# Altium PCB Canboardwteensy3.2.PcbDoc
Units mil, origin at the board's own origin, x right, y up, seen from the top; angles counter-clockwise.
Board outline 1850 x 2680 mil, 2 copper layers (Top Layer, Bottom Layer); 27 components, 27 nets, 204 pads, 21 vias.
Unrouted connection lines stored in the file: 1.
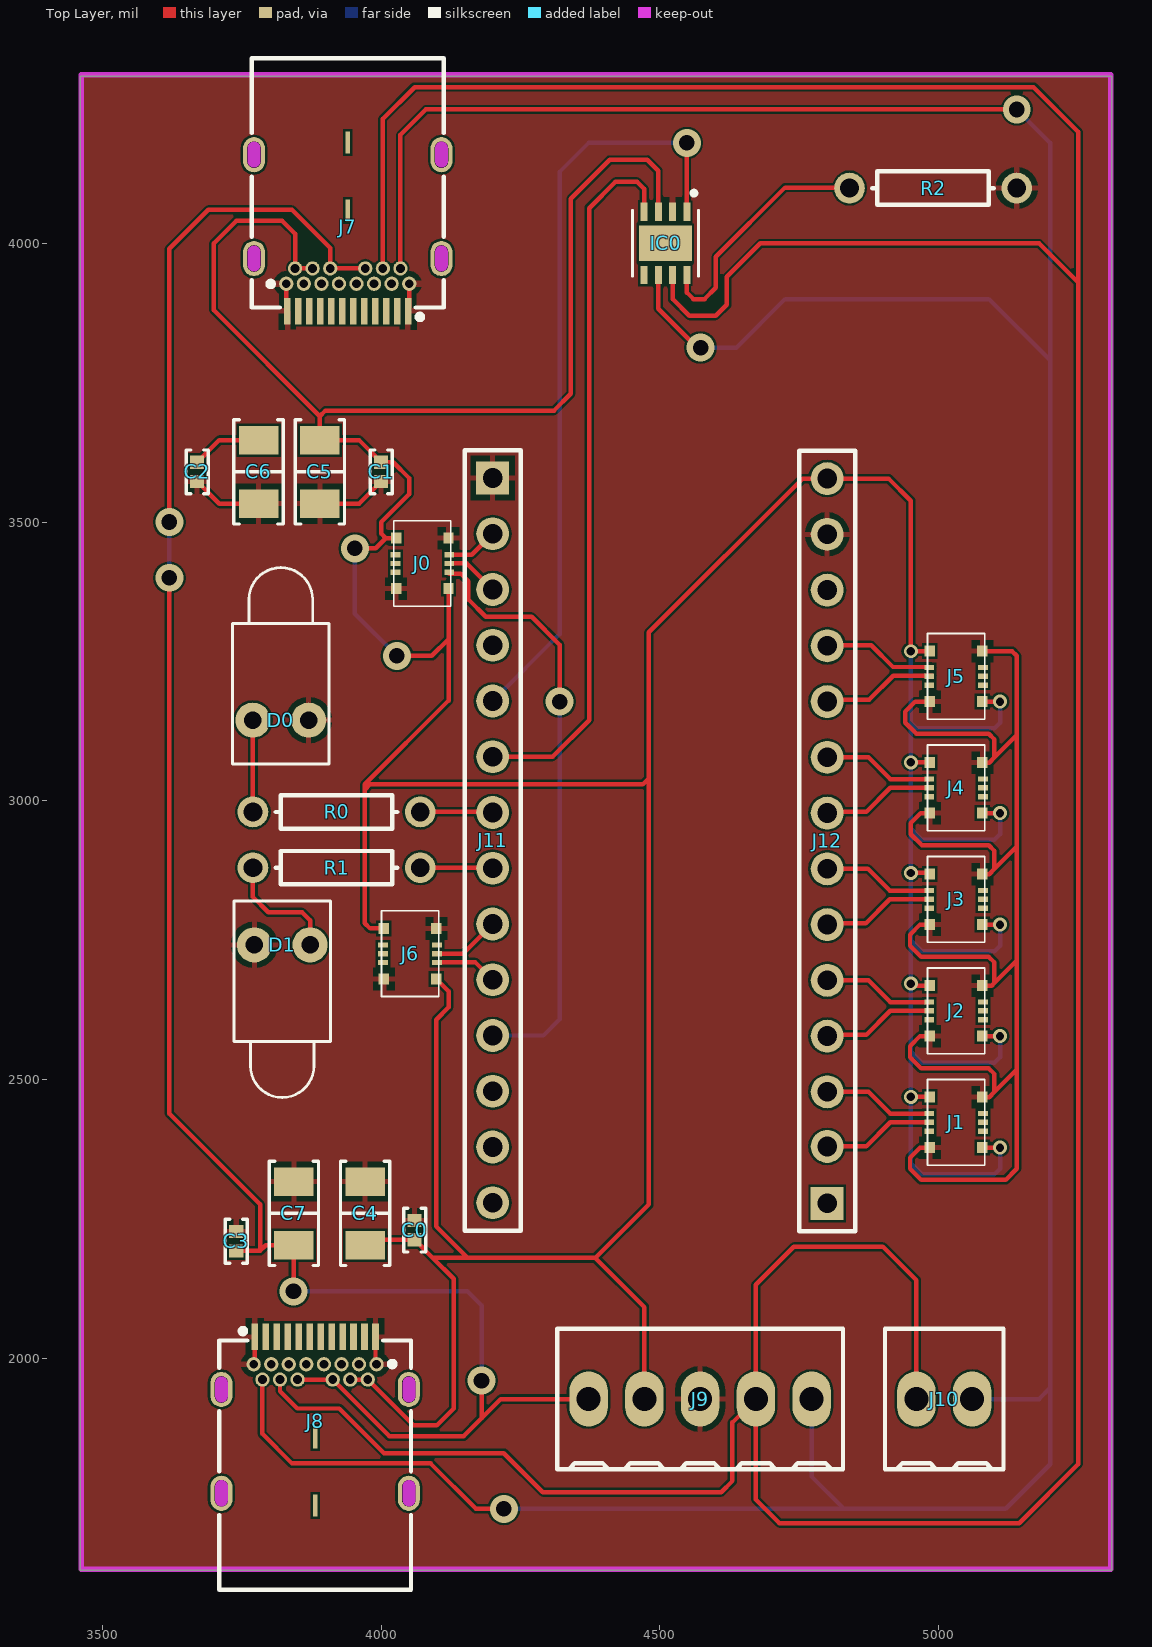
[diagram p0: Top Layer view]
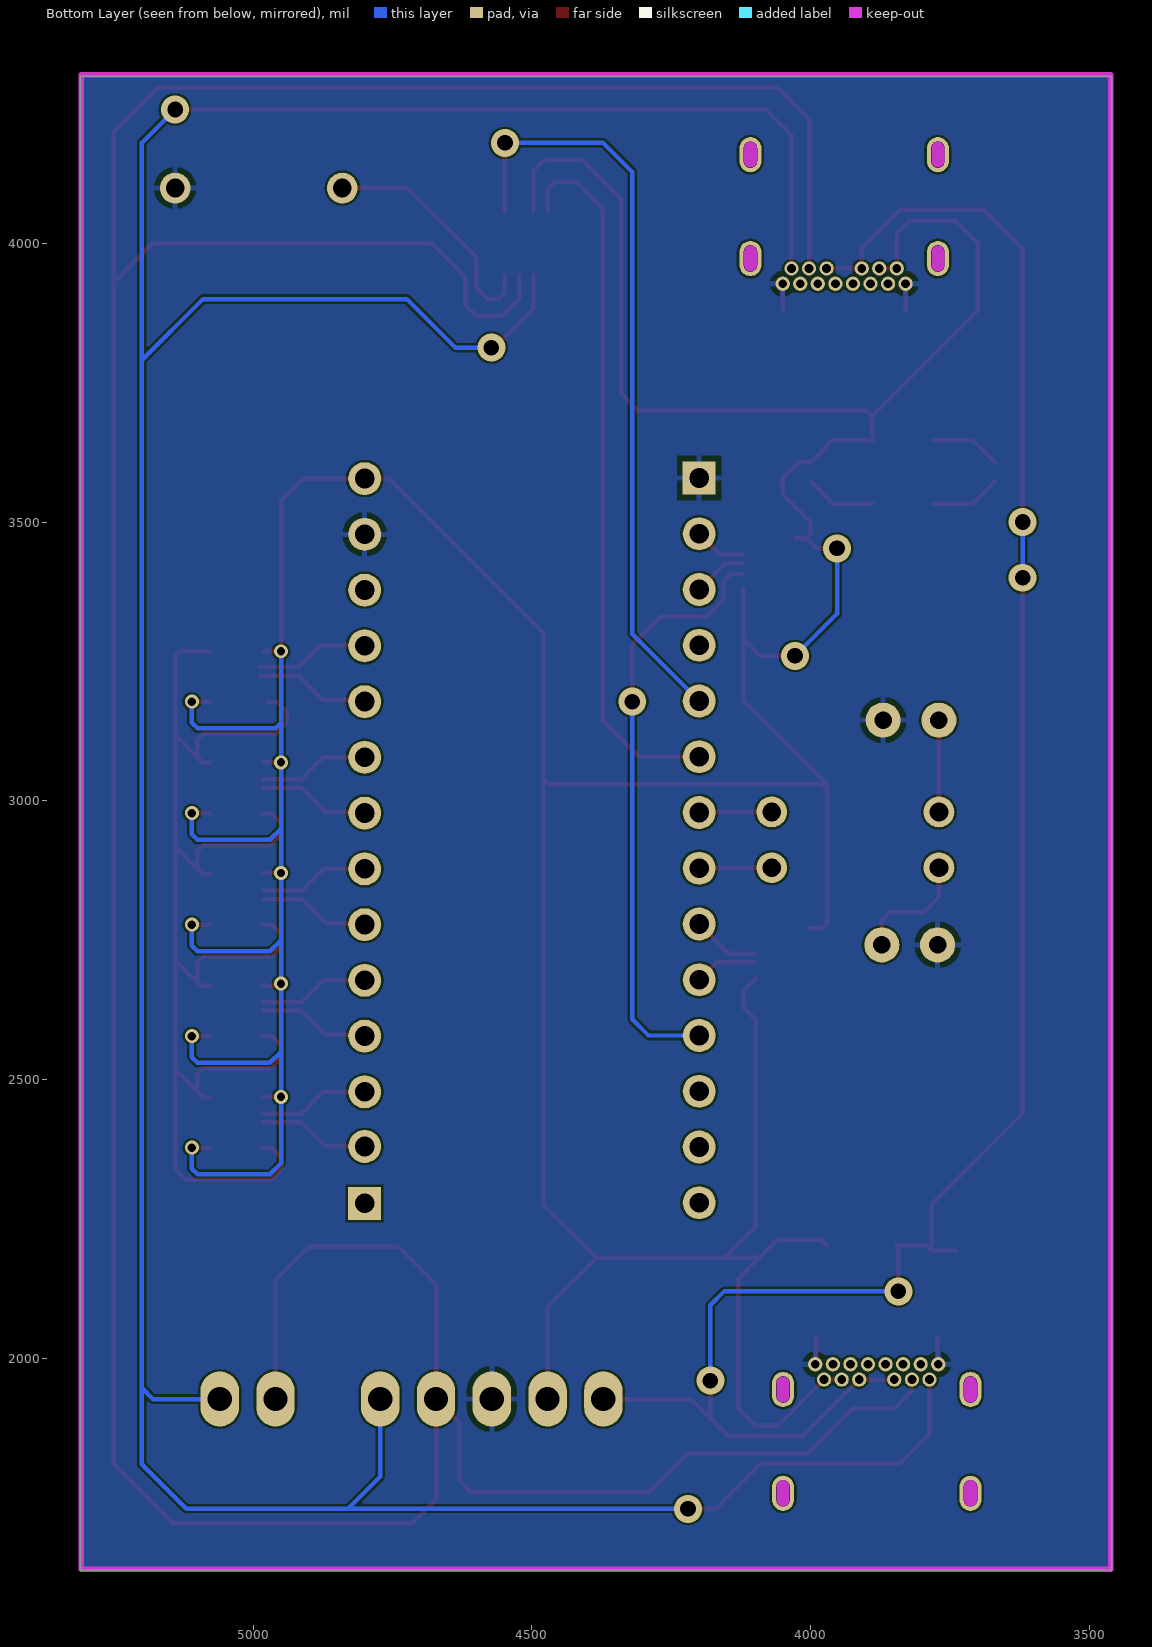
[diagram p1: Bottom Layer view, seen from below]
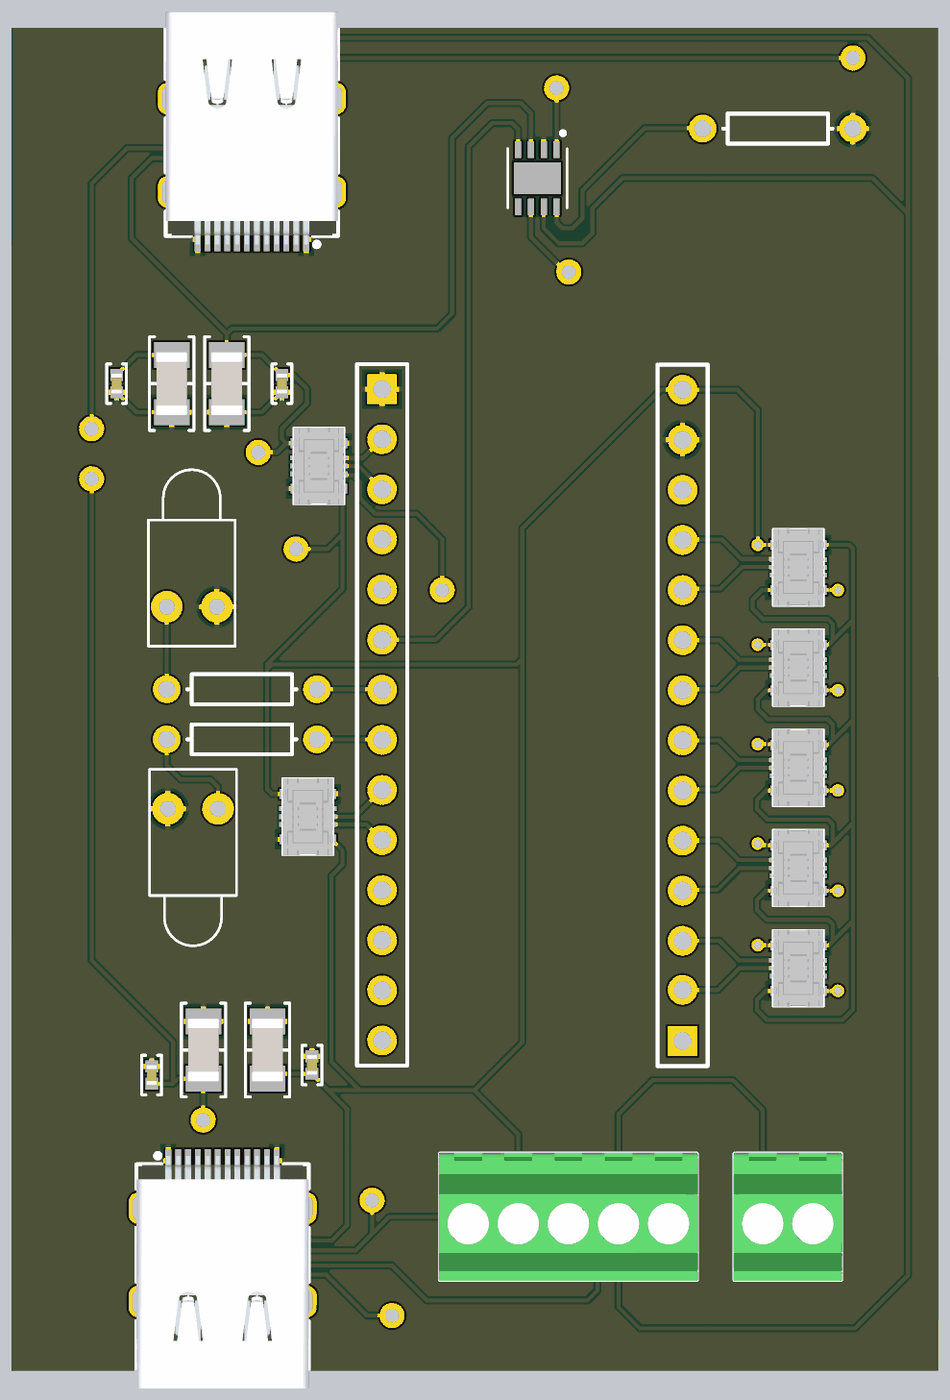
[diagram p2: 3D render of the assembled board from above, using the file's embedded part models]

## Layer stack, top to bottom
Top Solder: solder mask 0.4, Solder Resist, Dk 3.5
Top Layer: signal copper 1.4
Dielectric 1: dielectric 12.6, FR-4, Dk 4.8
Bottom Layer: signal copper 1.4
Bottom Solder: solder mask 0.4, Solder Resist, Dk 3.5

## Board outline
3460,4300 3460,1620 5310,1620 5310,4300
cut-out: 3771.89,4180.51

## Design rules (kind name [scope] priority, off if disabled: settings)
Clearance Clearance_6 [All] p1: gap=4 ignorepadtopadclearanceinfootprint=TRUE except(0: Poly-Poly)
MinimumSolderMaskSliver [All] p1: minsoldermaskwidth=4
PolygonConnect [All] p1: connectstyle=Relief reliefconductorwidth=10 reliefentries=4 polygonreliefangle="90 Angle" airgapwidth=10
RoomDefinition SensorBoardSchematic [InComponentClass('SensorBoardSchematic')] p1: confinementstyle=ConfineIn formatcopy=TRUE lockcomponents=FALSE outline 5306.85,1620 3460,1620 3460,4300 5306.85,4300
RoomDefinition "Sensor Input" [InComponentClass('Sensor Input')] p2: confinementstyle=ConfineIn formatcopy=TRUE lockcomponents=FALSE outline 5310.15,1620 3460,1620 3460,4300 5310.15,4300
RoutingVias [All] p1: holewidth=28 width=50 viastyle="Through Hole" minholewidth=28 minwidth=50 maxholewidth=28 maxwidth=50
SilkToSilkClearance [All] p1: silktosilkclearance=0
SilkToSolderMaskClearance [IsPad] p1: minsilkscreentomaskgap=4 clearancetoexposedcopper=TRUE
SolderMaskExpansion [All] p1: expansion=4
UnRoutedNet [All] p1: checkbadconnections=TRUE
Width [All] p1: maxlimit=8 minlimit=8 preferedwidth=8 minimp=50.000000 maximp=50.000000 favimp=50.000000
26 further rules are at their usual default settings.

## Classes and differential pairs
component class "Sensor Input": J0 J1 J2 J3 J4 J5 J6
component class SensorBoardSchematic: C0 C1 C2 C3 C4 C5 C6 C7 D0 D1 IC0 J7 J8 J9 J10 J11 J12 R0 R1 R2

## Components (designator, comment, footprint, x,y, rotation, side; value= is the part's Value field where it differs from the comment)
C0 "0.1uF" "CAP 0402/1005" 4060,2230 r270 top
C1 "0.1uF" "CAP 0402/1005" 4000,3590 r90 top
C2 "0.1uF" "CAP 0402/1005" 3670,3590 r90 top
C3 "0.1uF" "CAP 0402/1005" 3740,2210 r270 top
C4 "4.7uF" "CAP 1206/3216 - 1.8MM" 3971.3,2260 r270 top
C5 "4.7uF" "CAP 1206/3216 - 1.8MM" 3890,3590 r90 top
C6 "4.7uF" "CAP 1206/3216 - 1.8MM" 3780,3590 r90 top
C7 "4.7uF" "CAP 1206/3216 - 1.8MM" 3843.35,2260 r270 top
D0 "LED1" LED-1 3820,3144.61 r90 top
D1 "LED1" LED-1 3822.44,2741.5 r270 top
IC0 "TJA1051TK/3/1J" SON65P300X300X95-8N 4510,4000 r270 top
J0 "SlimStack 503548-0622" SlimStack_503548-0622 4125,3348.98 r90 top
J1 "SlimStack 503548-0622" SlimStack_503548-0622 4980,2500 r270 top
J2 "SlimStack 503548-0622" SlimStack_503548-0622 4980,2700 r270 top
J3 "SlimStack 503548-0622" SlimStack_503548-0622 4980,2900 r270 top
J4 "SlimStack 503548-0622" SlimStack_503548-0622 4980,3100 r270 top
J5 "SlimStack 503548-0622" SlimStack_503548-0622 4980,3300 r270 top
J6 "SlimStack 503548-0622" SlimStack_503548-0622 4102.95,2648.98 r90 top
J7 "632723300011" 632723300011 3940,4100 r180 top
J8 "632723300011" 632723300011 3881.5,1816.77 r0 top
J9 "282834-5" "TE 282834-5" 4572,1927 r180 top
J10 "282834-2" "TE 282834-2" 5010,1927 r180 top
J11 "Header 14" HDR1X14#1 4200,3579 r270 top
J12 "Header 14" HDR1X14#2 4800,2277.95 r90 top
R0 "Res1" AXIAL-0.3 3920,2980 r180 top value=1K
R1 "Res1" AXIAL-0.3 3920,2880 r180 top value=1K
R2 "Res1" AXIAL-0.3 4990,4099.03 r0 top value=1K

## Footprints (in the part's own frame and the unit in brackets; to place one, negate y for a bottom-side part, rotate by r counter-clockwise, add the part's x,y. Pads: shape width x height; smd on the part's side, far side on the other; paste and mask are expansions set on the pad)
632723300011 [mm] "USB 3.1 Type C Receptacle Horizontal THR"
  rect 0.3x1.2 smd: A1(-2.75,5.635) A2(-2.25,5.635) A3(-1.75,5.635) A4(-1.25,5.635) A5(-0.75,5.635) A6(-0.25,5.635) A7(0.25,5.635) A8(0.75,5.635) A9(1.25,5.635) A10(1.75,5.635) A11(2.25,5.635) A12(2.75,5.635)
  round 0.65 hole 0.4: B1(2.8,4.385) B2(2.4,3.685) B3(1.6,3.685) B4(1.2,4.385) B5(0.8,3.685) B6(0.4,4.385) B7(-0.4,4.385) B8(-0.8,3.685) B9(-1.2,4.385) B10(-1.6,3.685) B11(-2.4,3.685) B12(-2.8,4.385) Shell(-2,4.385) Shell(2,4.385)
  oval 1x1.6 hole 0.6 slot 1.2 at 90 deg: Shell(-4.27,3.235) Shell(-4.27,-1.495) Shell(4.27,3.235) Shell(4.27,-1.495)
  rect 0.2x1 smd: ""(0,1.055) ""(0,-2.045)
  silkscreen extent -4.37,-5.89 4.37,6.01, body extent -4.37,-5.9 4.37,5.9, height 3.05
AXIAL-0.3 [mm] "Axial Device, Thru-Hole; 2 Leads; 0.3 in Pin Spacing"
  round 1.4 hole 0.85: 1(-3.81,0) 2(3.81,0)
  silkscreen extent -2.77,-0.76 2.77,0.76
"CAP 0402/1005" [mm] "Chip Capacitor, 2-Leads, Body 1.02x0.51mm, IPC Medium Density"
  rect 0.6x0.64 smd: 1(-0.44,0) 2(0.44,0)
  silkscreen extent -1,-0.5 1,0.5, body extent -0.5,-0.26 0.5,0.26, height 0.52
"CAP 1206/3216 - 1.8MM" [mm] "Chip Capacitor, 2-Leads, Body 3.25x1.60mm, IPC Medium Density"
  rect 1.3x1.8 smd: 1(-1.45,0) 2(1.45,0)
  silkscreen extent -2.37,-1.12 2.37,1.12, body extent -1.6,-0.8 1.6,0.8, height 1.8
HDR1X14#1 [mm] "Connector; Header; 14 Position"
  rect 1.5x1.5 hole 0.9: 1(0,0)
  round 1.5 hole 0.9: 2(2.54,0) 3(5.08,0) 4(7.62,0) 5(10.16,0) 6(12.7,0) 7(15.24,0) 8(17.78,0) 9(20.32,0) 10(22.86,0) 11(25.4,0) 12(27.94,0) 13(30.48,0) 14(33.02,0)
  silkscreen extent -1.27,-1.27 34.29,1.27
HDR1X14#2 [mm] "Connector; Header; 14 Position"
  rect 1.5x1.5 hole 0.9: 1(0,0)
  round 1.5 hole 0.9: 2(2.592,0) 3(5.08,0) 4(7.62,0) 5(10.16,0) 6(12.7,0) 7(15.24,0) 8(17.78,0) 9(20.32,0) 10(22.86,0) 11(25.4,0) 12(27.94,0) 13(30.48,0) 14(33.02,0)
  silkscreen extent -1.27,-1.27 34.29,1.27
LED-1 [mm] "LED; 2 Leads"
  round 1.6 hole 0.8: 1(0,1.27) 2(0,-1.27)
  silkscreen extent -2,-2.2 6.95,2.2
SlimStack_503548-0622 [mm]
  rect 0.5x0.47 smd paste+0: 1(0.8,0.105) 2(3.1,0.105) 3(3.1,2.495) 4(0.8,2.495)
  rect 0.24x0.45 smd paste+0 mask+0.05: 5(1.55,0.075) 6(1.95,0.075) 7(2.35,0.075) 8(1.55,2.525) 9(1.95,2.525) 10(2.35,2.525)
  silkscreen extent 0,0 3.9,2.6, body extent 0,0 3.9,2.6, height 1
SON65P300X300X95-8N [mm]
  rect 0.84x0.32 smd: 1(-1.445,0.975) 2(-1.445,0.325) 3(-1.445,-0.325) 4(-1.445,-0.975) 5(1.445,-0.975) 6(1.445,-0.325) 7(1.445,0.325) 8(1.445,0.975)
  rect 1.6x2.4 smd: 9(0,0)
  silkscreen extent -2.38,-1.5 1.5,1.5
"TE 282834-2" [mm]
  oval 1.75x2.5 hole 1.1: 1(-1.27,0) 2(1.27,0)
  silkscreen extent -2.7,-3.2 2.7,3.2, body extent -2.77,-3.25 2.77,3.25, height 10
"TE 282834-5" [mm]
  oval 1.75x2.5 hole 1.1: 1(-5.08,0) 2(-2.54,0) 3(0,0) 4(2.54,0) 5(5.08,0)
  silkscreen extent -6.51,-3.2 6.51,3.2, body extent -6.58,-3.25 6.58,3.25, height 10

## Part data
C0 C1 C2 C3: library part C1005X7R1V104K050BB, "CAP CER 0.1UF 35V X7R 0402", Device Package="0402 (1005 Metric)", Manufacturer="TDK Corporation", Supplier Part Number 1=445-7344-2-ND, TemperatureCoefficient=X7R, TemperatureRange="-55C ~ 125C", Tolerance=10%, Voltage=35V, ComponentLink1Description=Datasheet, ComponentLink1URL=https://product.tdk.com/info/en/catalog/datasheets/mlcc_commercial_general_en.pdf, ComponentLink2Description="Digi-Key listing", ComponentLink2URL=http://digikey.com/product-detail/en/C1005X7R1V104K050BB/445-7344-2-ND/2732779, PartId=3862, Part Number=C1005X7R1V104K050BB, Price=0.0287, Supplier 1=Digi-Key, Type=-
C4 C5 C6 C7: library part 160R18X475KV4E, "CAP CER 4.7UF 16V X5R 1206", Device Package="1206 (3216 Metric)", Manufacturer="Johanson Dielectrics Inc.", Supplier Part Number 1=709-1234-2-ND, TemperatureCoefficient=X5R, TemperatureRange="-55C ~ 85C", Tolerance=10%, Voltage=16V, ComponentLink1Description=Datasheet, ComponentLink1URL=http://www.johansondielectrics.com/downloads/JDI-Tanceram.pdf, ComponentLink2Description="Digi-Key Listing", ComponentLink2URL=https://www.digikey.com/product-detail/en/johanson-dielectrics-inc/160R18X475KV4E/709-1234-2-ND/2074906, PartId=17939, Part Number=160R18X475KV4E, Price=0.1462, Supplier 1=Digi-Key
D0 D1: "Typical RED GaAs LED", LatestRevisionDate=08-Jul-2005, LatestRevisionNote="Mech Layer 1 removed.", PackageDescription="LED; 2 Leads", PackageReference=LED-1, Published=8-Jun-2000, Publisher="Altium Limited"
IC0: "TJA1051 Single 5 V 1 MBd Surface Mount High Speed CAN Transceiver - HVSON-8", Package="VDFN-8 NXP Semiconductors", Availability=Unavailable, MF="NXP USA", MP=TJA1051TK/3/1J, Price=None, SnapEDA_Link=https://www.snapeda.com/parts/TJA1051TK/3/1J/NXP%20USA%20Inc./view-part/?ref=snap
J0 J1 J2 J3 J4 J5 J6: library part SlimStack_503548-0622
J7 J8: "USB 3.1 Type C Receptacle Horizontal THR WR-COM", ComponentLink1Description=Manufacturer, ComponentLink1URL=http://www.we-online.de, ComponentLink2Description=Datasheet, ComponentLink2URL=http://katalog.we-online.de/em/datasheet/632723x00011.pdf, Construction=THR, Gender=Receptacle, Interface Type="Type C", Part Number=632723300011, Published Date="April 2017", Publisher="Wurth Elektronik", Sub-Family="USB 3.1", Type=Horizontal
J9: "TERM BLOCK 5POS SIDE ENT 2.54MM", Colour=Green, Manufacturer="TE Connectivity AMP Connectors", Supplier Part Number 1=A98336-ND, TemperatureRange="-40C ~ 105C", Voltage=150V, ComponentLink1Description=Datasheet, ComponentLink1URL=http://www.te.com/commerce/DocumentDelivery/DDEController?Action=srchrtrv&DocNm=282834&DocType=Customer+Drawing&DocLang=English, ComponentLink2Description="Digi-Key Listing", ComponentLink2URL=http://www.digikey.ca/product-detail/en/282834-5/A98336-ND/1153266, Number Of Levels=1, Orientation="Horizontal with Board", PartId=9292, Part Number=282834-5, Pitch="0.100\" (2.54mm)", Positions Per Level=5, Price=3.99, Supplier 1=Digi-Key
J10: "TERM BLOCK 2POS SIDE ENT 2.54MM", Colour=Green, Manufacturer="TE Connectivity AMP Connectors", Supplier Part Number 1=A98333-ND, TemperatureRange="-40C ~ 105C", Voltage=150V, ComponentLink1Description=Datasheet, ComponentLink1URL=http://www.te.com/commerce/DocumentDelivery/DDEController?Action=srchrtrv&DocNm=282834&DocType=Customer+Drawing&DocLang=English, ComponentLink2Description="Digi-Key Listing", ComponentLink2URL=http://www.digikey.ca/product-detail/en/282834-2/A98333-ND/1150135, Number Of Levels=1, Orientation="Horizontal with Board", PartId=9289, Part Number=282834-2, Pitch="0.100\" (2.54mm)", Positions Per Level=2, Price=1.3, Supplier 1=Digi-Key
J11 J12: "Header, 14-Pin", LatestRevisionDate=17-Jul-2002, LatestRevisionNote="Re-released for DXP Platform.", Publisher="Altium Limited"
R0 R1 R2: "Resistor", LatestRevisionDate=17-Jul-2002, LatestRevisionNote="Re-released for DXP Platform.", PackageDescription="Axial Device, Thru-Hole; 2 Leads; 0.3 in Pin Spacing", PackageReference=AXIAL-0.3, Published=8-Jun-2000, Publisher="Altium Limited"

## Via types
v1: diameter 50, hole 28, Top Layer to Bottom Layer, 11 vias
v2: diameter 25, hole 15, Top Layer to Bottom Layer, 10 vias

## Nets (pads, with @x,y where several pads share a name; then routed paths per layer and width w, separated by ;. In a path a pad name is that pad's centre, name@x,y a point inside that pad or via, vN(x,y) a via of type N, cw(c..) or ccw(c..) an arc to the next point about the centre after c; other vN are vias at no path point)
+5: C0.2 C1.2 C4.2 C5.2 IC0.3 J0.1 J0.3 J1.1 J1.3 J2.1 J2.3 J3.1 J3.3 J4.1 J4.3 J5.1 J5.3 J6.1 J6.3 J7.B2 J7.B3 J8.B2 J8.B3 J9.4 J12.14 | length 9829.4
  Top Layer w8: J7.B3 J7.B2 3845.51,4017.24 3822.76,4040 3740,4040 3700,4000 3700,3880 3890,3690 ; J8.B3 J8.B2 4057.83,1880 4100,1880 4130,1910 4130,2142.68 4092.68,2180 ; v1(3952.76,3452.76) 3990,3452.76 4008.27,3471.02 ; C4.2 3981.06,2212.68 C0.2 4092.68,2180 ; J6.3 3980,2771.02 3970.47,2780.55 3970.47,3020 ; J0.3 4008.27,3471.02 ; v1(4028.19,3260) 4090.87,3260 4120.87,3290 ; J6.1 4120.87,2658.43 4120.87,2629.53 4098.82,2607.48 4098.82,2236.54 4155.35,2180 ; J0.1 4120.87,3290 ; J9.4 4472,2092 4384,2180 ; IC0.3 4497.2,4130 4477.2,4150 4410,4150 4340,4080 4340,3730 4310,3700 3900,3700 3890,3690 ; v2(4950,2469.05) J1.1@4981.77,2469.05 ; v2(4950,2672.05) 4953.54,2668.5 J2.1 ; v2(4950,2870.55) J3.1@4981.77,2870.55 ; v2(4950,3069.05) J4.1@4981.77,3069.05 ; J5.1@4981.77,3268.19 v2(4950,3268.19) 4950,3537.95 4910,3577.95 J12.14 4755.91,3577.95 4480,3302.05 4480,3040 ; J1.3 v2(5110,2377.95) ; J2.3 v2(5110,2577.95) ; J3.3 v2(5110,2777.95) ; J4.3 v2(5110,2977.95) ; J5.3 v2(5110,3177.95) ; 3890,3690 C5.2 3960.24,3647.09 C1.2 4021.68,3607.32 4050,3579 4050,3550 4000,3500 4000,3479.29 4008.27,3471.02 ; 3970.47,3020 3970.47,3029.45 4120.87,3179.84 4120.87,3290 ; 3970.47,3020 3979.92,3029.45 4469.45,3029.45 4480,3040 ; 4092.68,2180 4155.35,2180 ; 4155.35,2180 4384,2180 ; 4384,2180 4480,2276 4480,3040
  Bottom Layer w8: v1(3952.76,3452.76) 3952.76,3335.43 v1(4028.19,3260) ; v2(4950,3268.19) 4950,3140 ; v2(5110,2377.95) 5110,2340 5100,2330 4970,2330 4950,2350 v2(4950,2469.05) 4950,2550 ; v2(5110,2577.95) 5110,2540 5100,2530 4970,2530 4950,2550 ; v2(5110,2777.95) 5110,2740 5100,2730 4970,2730 4950,2750 ; v2(5110,2977.95) 5110,2940 5100,2930 4970,2930 4950,2950 ; v2(5110,3177.95) 5110,3140 5100,3130 4960,3130 4950,3140 ; 4950,2550 v2(4950,2672.05) 4950,2750 ; 4950,2750 v2(4950,2870.55) 4950,2950 ; 4950,2950 v2(4950,3069.05) 4950,3140
+12: C2.2 C3.2 C6.2 C7.2 J7.B5 J7.B8 J8.B5 J8.B8 J9.5 | length 3795.5
  Top Layer w8: v1(3620,3400) 3620,2439 3782.68,2276.32 3782.68,2192.68 ; v1(3620,3500) 3620,3990 3690,4060 3840,4060 3908.51,3991.49 J7.B5 J7.B8 ; C2.2 3709.76,3647.09 C6.2 ; C3.2 3782.68,2192.68 ; v1(3842.76,2120) 3842.76,2198.33 3845.35,2200.91 C7.2 3792.91,2202.91 3782.68,2192.68 ; J8.B8 J8.B5 4014.84,1860 4147.68,1860 4180,1892.32 ; v1(4180,1960) 4180,1892.32 ; J9.5@4355,1910 J9.5 4214.68,1927 4180,1892.32
  Bottom Layer w8: v1(3620,3400) v1(3620,3500) ; v1(3842.76,2120) 4155.35,2120 4180,2095.35 v1(4180,1960)
A1: J1.6 J12.2 | length 200.9
  Top Layer w8: J12.2 4870,2380 4913.23,2423.23 J1.6
A2: J2.6 J12.4 | length 200.9
  Top Layer w8: J12.4@4800,2580 4870,2580 4913.23,2623.23 J2.6
A3: J3.6 J12.6 | length 200.9
  Top Layer w8: J12.6@4799,2780 4869,2780 4912.23,2823.23 J3.6@4981.95,2823.23
A4: J4.6 J12.8 | length 200.9
  Top Layer w8: J12.8@4800,2980 4870,2980 4913.23,3023.23 J4.6
A5: J5.6 J12.10 | length 200.9
  Top Layer w8: J12.10@4805,3181 4875,3181 4918.23,3224.23 J5.6@4987.95,3224.23
A6: J6.5 J11.10 | length 112.8
  Top Layer w8: J6.5 4169,2710 J11.10
B1: J1.5 J12.3 | length 199.1
  Top Layer w8: J12.3 4874.05,2477.95 4913.02,2438.98 J1.5
B2: J2.5 J12.5 | length 199.1
  Top Layer w8: J12.5 4874.05,2677.95 4913.02,2638.98 J2.5
B3: J3.5 J12.7 | length 199.1
  Top Layer w8: J12.7@4799,2877.95 4873.05,2877.95 4912.02,2838.98 J3.5@4981.95,2838.98
B4: J4.5 J12.9 | length 199.1
  Top Layer w8: J12.9 4874.05,3077.95 4913.02,3038.98 J4.5
B5: J5.5 J12.11 | length 199.1
  Top Layer w8: J12.11@4805,3278.95 4879.05,3278.95 4918.02,3239.98 J5.5@4987.95,3239.98
B6: J6.6 J11.9 | length 122.1
  Top Layer w8: J6.6 4146.75,2725.75 J11.9
GND: C0.1 C1.1 C2.1 C3.1 C4.1 C5.1 C6.1 C7.1 D0.2 D1.2 IC0.2 J0.2 J0.4 J1.2 J1.4 J2.2 J2.4 J3.2 J3.4 J4.2 J4.4 J5.2 J5.4 J6.2 J6.4 J7.A1 J7.A12 J7.B1 J7.B12 J8.A1 J8.A12 J8.B1 J8.B12 J9.3 J11.1 J12.13 R2.2 | length 3081.2
  Top Layer w8: C2.1 3709.76,3532.91 C6.1 ; J8.B12 3773.23,1991.37 J8.A1 ; J7.B1 3829.77,3880.12 J7.A12 ; C5.1 3960.24,3532.91 C1.1 ; J8.A12 3989.77,1991.37 J8.B1 ; J7.A1 4050.24,3880.12 J7.B12 ; 4974.13,3177.95 4957.95,3177.95 4940,3160 4940,3140 4960,3120 5090,3120 5100,3110 5100,3077.95 ; J1.2 4966.46,2377.95 4948.5,2360 4948.5,2340 4968.5,2320 5120,2320 5140,2340 5140,2517.95 ; J2.2 4966.46,2577.95 4948.5,2560 4948.5,2540 4968.5,2520 5090,2520 5100,2510 5100,2477.95 ; J3.2 4966.46,2777.95 4948.5,2760 4948.5,2740 4968.5,2720 5090,2720 5100,2710 5100,2673.54 ; J4.2 4967.95,2977.95 4950,2960 4950,2940 4970,2920 5090,2920 5100,2910 5100,2877.95 ; J1.4 5090.55,2468.5 5100,2477.95 ; J2.4 5094.96,2668.5 5100,2673.54 ; J3.4 5090.55,2868.5 5100,2877.95 ; J4.4 5090.55,3068.5 5100,3077.95 ; J5.4 5131.5,3268.5 5140,3260 5140,3117.95 ; 5100,2477.95 5140,2517.95 ; 5100,2673.54 5140,2713.54 ; 5100,2877.95 5140,2917.95 ; 5100,3077.95 5140,3117.95 ; 5140,2517.95 5140,2713.54 ; 5140,2713.54 5140,2917.95 ; 5140,2917.95 5140,3117.95
NetD0_1: D0.1 R0.2 | length 164.6
  Top Layer w8: R0.2 D0.1
NetD1_1: D1.1 R1.2 | length 216.5
  Top Layer w8: R1.2 3770,2827.48 3797.48,2800 3858.11,2800 3872.44,2785.67 D1.1
NetIC0_1: IC0.1 J11.5 | length 1390.7
  Top Layer w8: IC0.1 v1(4548.39,4180)
  Bottom Layer w8: J11.5@4219,3179 J11.5 4320,3299 4320,4128 4372,4180 v1(4548.39,4180)
NetIC0_4: IC0.4 J11.6 | length 1282.4
  Top Layer w8: J11.6 4307.39,3079 4373,3144.61 4373,4063 4420,4110 4459.03,4110 4471.61,4097.42 IC0.4
NetIC0_6: IC0.6 J7.B11 J8.B11 J9.1 J10.1 | length 6661
  Top Layer w8: J8.B11 3787.01,1864.49 3840,1811.5 4088.5,1811.5 4170,1730 v1(4220,1730) ; J7.B11 4034.49,4194.49 4080,4240 4280,4240 v1(5140,4240) ; IC0.6 4497.2,3882.8 4567.17,3812.83 v1(4572.83,3812.83)
  Bottom Layer w8: v1(4220,1730) 4830,1730 ; v1(4572.83,3812.83) 4637.24,3812.83 4724.41,3900 5090,3900 5200,3790 ; J9.1 4772,1788 4830,1730 ; J10.1 5180,1927 5200,1947 ; v1(5140,4240) 5200,4180 5200,3790 ; 4830,1730 5120,1730 5200,1810 5200,1947 ; 5200,1947 5200,3790
NetIC0_7: IC0.7 J7.B10 J8.B10 J9.2 J10.2 | length 7515.2
  Top Layer w8: J8.B10 3818.51,1941.1 3849.61,1910 3925.04,1910 4005.04,1830 4220,1830 4290,1760 4610,1760 4630,1780 4630,1885 J9.2 ; J7.B10 4003,4222.99 4060,4280 4220,4280 5170,4280 5250,4200 5250,3930 ; IC0.7 4522.8,3900 4552.8,3870 4600,3870 4620,3890 4620,3940 4680,4000 5180,4000 5250,3930 ; J10.2 4960,2140 4900,2200 4740,2200 4672,2132 J9.2 ; J9.2 4672,1746.77 4714.39,1704.38 5144.38,1704.38 5250,1810 5250,3930
NetIC0_8: IC0.8 R2.1 | length 443.7
  Top Layer w8: IC0.8 4548.39,3911.61 4560,3900 4580,3900 4600,3920 4600,3975.59 4724.41,4100 4839.03,4100 R2.1
NetJ11_7: J11.7 R0.1 | length 130.4
  Top Layer w8: R0.1 4199,2980 J11.7
NetJ11_8: J11.8 R1.1 | length 130.4
  Top Layer w8: R1.1 4199,2880 J11.8
"PWM 2": J0.5 J11.11 | length 1073.7
  Top Layer w8: J0.5@4122.05,3407.02 4142.98,3407.02 4156.47,3393.53 4156.47,3360.97 4187.44,3330 4270,3330 4320,3280 v1(4320,3177.95)
  Bottom Layer w8: J11.11 4291,2579 4320,2608 v1(4320,3177.95)
RX1: J0.7 J11.2 | length 93.5
  Top Layer w8: J0.7 4162.5,3441.5 J11.2
TX1: J0.6 J11.3 | length 97.3
  Top Layer w8: J0.6 4153.25,3425.75 J11.3
pads on no net: IC0.5 IC0.9 J0.8 J0.9 J0.10 J1.7 J1.8 J1.9 J1.10 J2.7 J2.8 J2.9 J2.10 J3.7 J3.8 J3.9 J3.10 J4.7 J4.8 J4.9 J4.10 J5.7 J5.8 J5.9 J5.10 J6.7 J6.8 J6.9 J6.10 J7. J7.A2 J7.A3 J7.A4 J7.A5 J7.A6 J7.A7 J7.A8 J7.A9 J7.A10 J7.A11 J7.B4 J7.B6 J7.B7 J7.B9 J7.Shell J8. J8.A2 J8.A3 J8.A4 J8.A5 J8.A6 J8.A7 J8.A8 J8.A9 J8.A10 J8.A11 J8.B4 J8.B6 J8.B7 J8.B9 J8.Shell J11.4 J11.12 J11.13 J11.14 J12.1 J12.12
copper on no net: | length 2.1
  Top Layer w8: 3713,1921 ccw(c3712.06,1921.94) 3713.39,1921.94 ; 3713,1967 cw(c3712.06,1966.06) 3713.39,1966.06

## Polygon pours and split planes (outlines as drawn)
GND on Bottom Layer (solid, pour order 16): 5300,4300 5310,4290 5310,1620 3460,1620 3460,1633.85 3460,4300
GND on Top Layer "Top Layer-GND" (solid, pour order 14): 3460,4303.23 5310.39,4303.23 5308.38,1620 3458.15,1620

## Keep-outs
Keep-Out Layer:
  lines w10: 3462,1621.54 5308.61,1621.54 5308.61,4301.94 3462,4301.94 3462,1621.54
  lines w23: 3713.39,1746 3713.39,1770 ; 3713.39,1932.32 3713.39,1956 ; 3771.89,3960.83 3771.89,3984.51 ; 3771.89,4147.05 3771.89,4170.73 ; 4049.61,1746 4049.61,1770 ; 4049.61,1932.32 4049.61,1956 ; 4108.11,3960.83 4108.11,3984.51 ; 4108.11,4147.05 4108.11,4170.73